# EAGLE board harp syringe pump v1.1 (EAGLE 9.6.2)
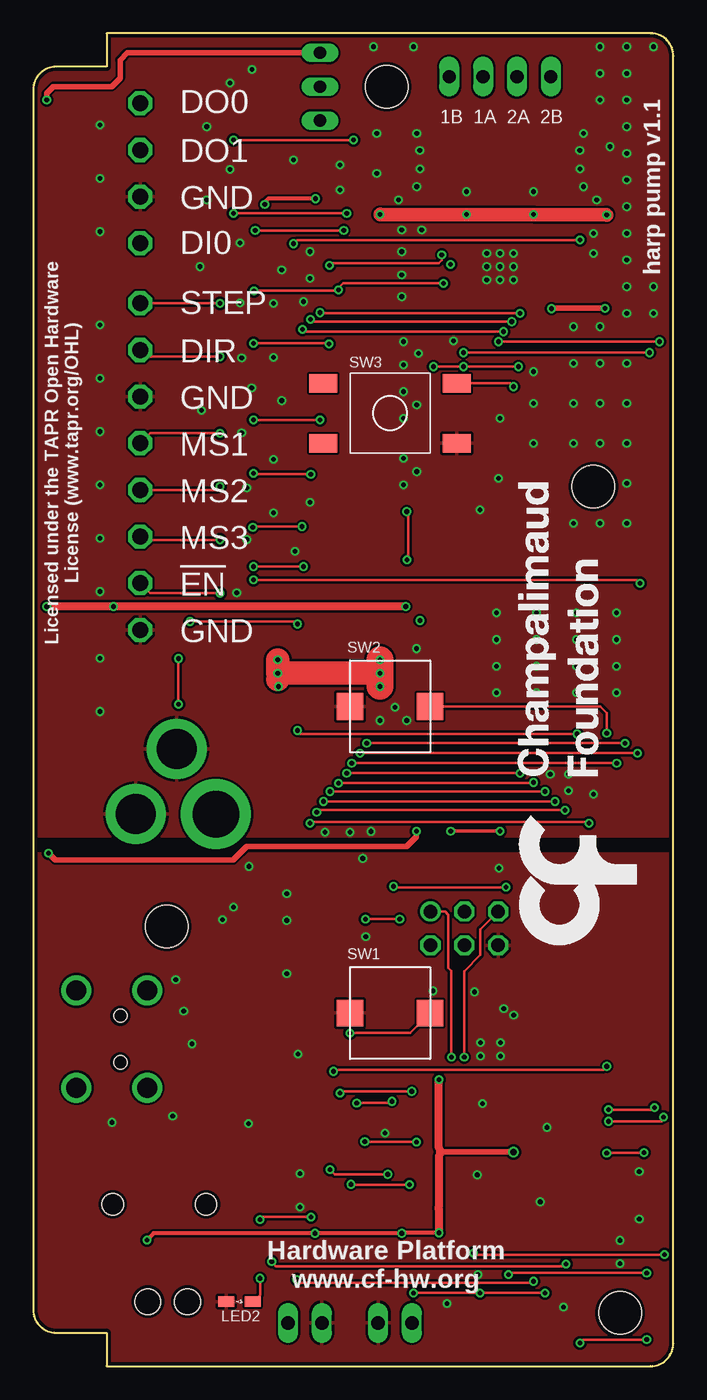
[diagram p0: board, top side]
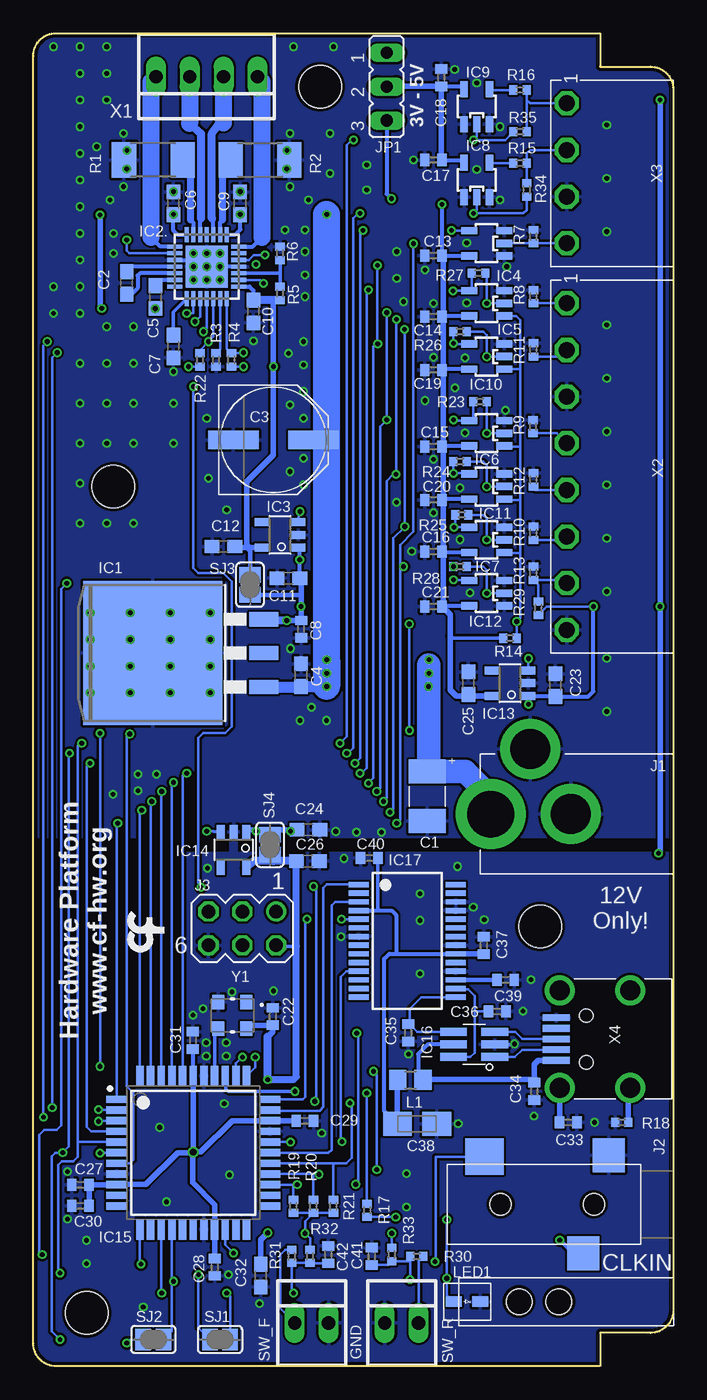
[diagram p1: board, bottom side, seen from below]

Size 48 x 100 mm. Coordinates in mm from the lower left corner, seen from the top.
Outline: 5.5,0 46.29,0 arc90 48,1.71 48,98.31 arc90 46.31,100 5.5,100 5.5,97.5 1.71,97.5 arc90 0,95.79 0,4.21 arc90 1.71,2.5 5.5,2.5 5.5,0
Copper layers (1*16): Top 0.018mm / dielectric 1.55mm / Bottom 0.018mm
Design rules "eC_2Layer_PClass5_BaseCopperO18 *": minimum track width 0.175mm, minimum drill 0.35mm, track to track 0.175mm, track to pad 0.175mm, pad to pad 0.175mm, via to via 0.175mm, smd to smd 0mil, copper to edge 0.25mm, drill to drill 0.35mm, minimum pad ring 0.2mm, minimum via ring 0.15mm, stop-mask expansion 0mil, vias tented up to drill 0.45mm, thermal gap 0.2mm
Holes 3.2 mm at 42,66 26.5,96 44,4 10,33

## Footprints (pad centres in the part's own frame; a part is rotated, then mirrored left to right if it is on the bottom)
CAP_100UF_HAND = smd 1.8 x 2.8: + -1.85,0; - 1.85,0
C0603 = smd 1.1 x 1: 1 -0.85,0; 2 0.85,0
PANASONIC_E = smd 3.8 x 1.4: + 3,0; - -3,0
C0402 = smd 0.7 x 0.9: 1 -0.65,0; 2 0.65,0
A/3216-18W = smd 2.15 x 1.8: + 1.475,0; - -1.475,0
TO263-3 = smd 1.067 x 2.159: 1 -2.54,-5.791; 2 0,-5.791; 3 2.54,-5.791 | smd 10.8 x 10.41: TAB 0,2.54
QFN28ET = smd 1.15 x 0.3: 1 -2.4,1.5; 2 -2.4,1; 3 -2.4,0.5; 4 -2.4,0; 5 -2.4,-0.5; 6 -2.4,-1; 7 -2.4,-1.5; 15 2.4,-1.5; 16 2.4,-1; 17 2.4,-0.5; 18 2.4,0; 19 2.4,0.5; 20 2.4,1; 21 2.4,1.5 | smd 0.3 x 1.15: 8 -1.5,-2.4; 9 -1,-2.4; 10 -0.5,-2.4; 11 0,-2.4; 12 0.5,-2.4; 13 1,-2.4; 14 1.5,-2.4; 22 1.5,2.4; 23 1,2.4; 24 0.5,2.4; 25 0,2.4; 26 -0.5,2.4; 27 -1,2.4; 28 -1.5,2.4 | smd 3.15 x 3.15: EXP 0,0
TSOT23-5 = smd 0.6 x 1.05: 1 -0.95,-1.354; 2 0,-1.354; 3 0.95,-1.354; 4 0.95,1.354; 5 -0.95,1.354
SOT23-5 = smd 0.55 x 1.2: 1 -0.95,-1.3; 2 0,-1.3; 3 0.95,-1.3; 4 0.95,1.3; 5 -0.95,1.3
QFP80P1200X1200X120-44N = smd 1.55 x 0.55: 1 -5.75,4; 2 -5.75,3.2; 3 -5.75,2.4; 4 -5.75,1.6; 5 -5.75,0.8; 6 -5.75,0; 7 -5.75,-0.8; 8 -5.75,-1.6; 9 -5.75,-2.4; 10 -5.75,-3.2; 11 -5.75,-4; 23 5.75,-4; 24 5.75,-3.2; 25 5.75,-2.4; 26 5.75,-1.6; 27 5.75,-0.8; 28 5.75,0; 29 5.75,0.8; 30 5.75,1.6; 31 5.75,2.4; 32 5.75,3.2; 33 5.75,4 | smd 0.55 x 1.55: 12 -4,-5.75; 13 -3.2,-5.75; 14 -2.4,-5.75; 15 -1.6,-5.75; 16 -0.8,-5.75; 17 0,-5.75; 18 0.8,-5.75; 19 1.6,-5.75; 20 2.4,-5.75; 21 3.2,-5.75; 22 4,-5.75; 34 4,5.75; 35 3.2,5.75; 36 2.4,5.75; 37 1.6,5.75; 38 0.8,5.75; 39 0,5.75; 40 -0.8,5.75; 41 -1.6,5.75; 42 -2.4,5.75; 43 -3.2,5.75; 44 -4,5.75
SOT23-6L = smd 0.6 x 2: P$1 -0.95,-1.55; P$2 0,-1.55; P$3 0.95,-1.55; P$4 0.95,1.55; P$5 0,1.55; P$6 -0.95,1.55
SSOP28 = smd 0.4 x 1.5: 1 -4.225,-3.625; 2 -3.575,-3.625; 3 -2.925,-3.625; 4 -2.275,-3.625; 5 -1.625,-3.625; 6 -0.975,-3.625; 7 -0.325,-3.625; 8 0.325,-3.625; 9 0.975,-3.625; 10 1.625,-3.625; 11 2.275,-3.625; 12 2.925,-3.625; 13 3.575,-3.625; 14 4.225,-3.625; 15 4.225,3.625; 16 3.575,3.625; 17 2.925,3.625; 18 2.275,3.625; 19 1.625,3.625; 20 0.975,3.625; 21 0.325,3.625; 22 -0.325,3.625; 23 -0.975,3.625; 24 -1.625,3.625; 25 -2.275,3.625; 26 -2.925,3.625; 27 -3.575,3.625; 28 -4.225,3.625
DC_POWER_INPUT_2.1MM = drill 3.5: P1 8.5,0 | drill 3: P2 2.5,0; P3 5.55,-4.9
35RASMT2BHNTRX = smd 2.4 x 2.55: 1 0.8,3.675; 5 -1.1,-3.675 | smd 2.9 x 2.75: 4 8.2,-3.575 | hole 1.6: 0,0; 7,0
MA03-2 = drill 1.016: 1 -2.54,-1.27 | drill 1.016 octagon: 2 -2.54,1.27; 3 0,-1.27; 4 0,1.27; 5 2.54,-1.27; 6 2.54,1.27
JP2 = drill 0.914 long: 1 -2.54,0; 2 0,0; 3 2.54,0
R0805 = smd 1.3 x 1.5: 1 -0.95,0; 2 0.95,0
LED_HAND = smd 1.2 x 0.8: A -1,0; K 1,0
R2010 = smd 1.8 x 2.7: 1 -2.2,0; 2 2.2,0
R0402 = smd 0.6 x 0.7: 1 -0.5,0; 2 0.5,0
SJ = smd 1.168 x 1.6: 1 -0.762,0; 2 0.762,0
SW_B3AL = smd 2 x 2: O -3,0; P 3,0
SWITCH_LSH = smd 2.1 x 1.4: O0 -5,2.25; O1 5,2.25; P0 -5,-2.25; P1 5,-2.25
22-23-2021 = drill 1 long: 1 -1.27,0; 2 1.27,0
LED_PIPE_7513D2-L = hole 1.93: -1.486,0; 1.486,0
22-23-2041 = drill 1 long: 1 -3.81,0; 2 -1.27,0; 3 1.27,0; 4 3.81,0
CON_3.5MM_1X8 = drill 1.2 octagon: P1 -12.25,0; P2 -8.75,0; P3 -5.25,0; P4 -1.75,0; P5 1.75,0; P6 5.25,0; P7 8.75,0; P8 12.25,0
CON_3.5MM_1X4 = drill 1.2 octagon: P1 -5.25,0; P2 -1.75,0; P3 1.75,0; P4 5.25,0
240-0002-1 = smd 0.5 x 2: P$1 -1.6,8.65; P$2 -0.8,8.65; P$3 0,8.65; P$4 0.8,8.65; P$5 1.6,8.65 | drill 1.5: SHIELD_1 -3.65,3.1; SHIELD_2 3.65,3.1; SHIELD_3 3.65,8.4; SHIELD_4 -3.65,8.4 | hole 1: -1.75,6.4; 1.75,6.4
OSCILLATOR_3.2X2.5 = smd 0.9 x 1.1: P$1 -1.05,-1; P$2 1.05,-1; P$3 1.05,1; P$4 -1.05,1

## Placement (x,y rotation side)
C1  22uF  [CAP_100UF_HAND]  18.45,42.76 270 bottom
C2  100nF  [C0603]  41,81.28 90 bottom
C3  100uF  [PANASONIC_E]  30,69.5 0 bottom
C4  220nF  [C0603]  27.93,51.85 270 bottom
C5  100nF  [C0603]  38.83,80.22 90 bottom
C6  1uF  [C0603]  37.5,87.25 90 bottom
C7  220nF  [C0603]  37.5,76.5 90 bottom
C8  100nF  [C0402]  27.93,55.3 90 bottom
C9  1uF  [C0603]  32.5,87.25 90 bottom
C10  220nF  [C0603]  31.5,79.12 90 bottom
C11  10uF  [C0603]  28.88,59.12 180 bottom
C12  10uF  [C0603]  33.75,61.5 180 bottom
C13  100nF  [C0402]  18,83.33 180 bottom
C14  100nF  [C0402]  18,78.75 180 bottom
C15  100nF  [C0402]  18,69 180 bottom
C16  100nF  [C0402]  18,61.12 180 bottom
C17  100nF  [C0402]  18,90.5 180 bottom
C18  100nF  [C0402]  17.4,96.67 90 bottom
C19  100nF  [C0402]  18,74.75 180 bottom
C20  100nF  [C0402]  18,65 180 bottom
C21  100nF  [C0402]  18,57 180 bottom
C22  100nF  [C0402]  30.04,26.24 90 bottom
C23  10uF  [C0603]  8.85,51.1 90 bottom
C24  10uF  [C0603]  27.37,40.24 0 bottom
C25  10uF  [C0603]  15.38,51.25 90 bottom
C26  10uF  [C0603]  27.41,37.89 0 bottom
C27  100nF  [C0402]  44.47,13.62 180 bottom
C28  100nF  [C0402]  34.4,7.43 270 bottom
C29  100nF  [C0402]  27.63,18.42 0 bottom
C30  330nF  [C0402]  44.47,12.03 180 bottom
C31  330nF  [C0402]  36.03,24.44 90 bottom
C32  10uF  [C0603]  30.95,6.8 270 bottom
C33  4.7nF  [C0402]  7.88,18.28 0 bottom
C34  100nF  [C0402]  10.42,20.62 270 bottom
C35  47pF  [C0402]  19.89,25 270 bottom
C36  47pF  [C0402]  13.21,26.6 0 bottom
C37  100nF  [C0402]  14.21,31.57 90 bottom
C38  4.7uF  [A/3216-18W]  19.22,18.17 180 bottom
C39  100nF  [C0402]  12.58,28.99 0 bottom
C40  100nF  [C0402]  22.8,38.12 180 bottom
C41  100nF  [C0402]  22.62,8.25 90 bottom
C42  100nF  [C0402]  25.88,8.38 90 bottom
IC1  LM340S-05  [TO263-3]  36.5,53.5 90 bottom
IC2.  A4983  [QFN28ET]  35,82.5 0 bottom
IC3  LP5907MFX-3.3  [TSOT23-5]  29.5,62.38 90 bottom
IC4  SN74LVC1G125  [SOT23-5]  14,84.25 90 bottom
IC5  SN74LVC1G125  [SOT23-5]  14,79.75 90 bottom
IC6  SN74LVC1G125  [SOT23-5]  14,70 90 bottom
IC7  SN74LVC1G125  [SOT23-5]  14,62 90 bottom
IC8  SN74LVC1G125  [SOT23-5]  14.75,89 0 bottom
IC9  SN74LVC1G125  [SOT23-5]  14.75,94.5 0 bottom
IC10  SN74LVC1G125  [SOT23-5]  14,75.75 90 bottom
IC11  SN74LVC1G125  [SOT23-5]  14,66 90 bottom
IC12  SN74LVC1G125  [SOT23-5]  14,58 90 bottom
IC13  LP5907MFX-3.3  [TSOT23-5]  12.25,51.25 90 bottom
IC14  LP5907MFX-3.3  [TSOT23-5]  32.98,38.74 180 bottom
IC15  ATXMEGA128A4U-AU  [QFP80P1200X1200X120-44N]  36,16.02 0 bottom
IC16  USBLC6-2SC6  [SOT23-6L]  14.94,24.14 90 bottom
IC17  FT232RL  [SSOP28]  19.95,31.91 270 bottom
J1  DC_JACK2.1MM  [DC_POWER_INPUT_2.1MM]  5.19,41.42 180 bottom
J2  STEREO_JACK  [35RASMT2BHNTRX]  5.96,12.14 180 bottom
J3  [MA03-2]  32.32,32.84 180 bottom
JP1  [JP2]  21.5,96 270 bottom
L1  ???  [R0805]  19.72,21.48 0 bottom
LED1  LEDHAND  [LED_HAND]  15.46,4.84 0 bottom
LED2  GREEN  [LED_HAND]  15.46,4.84 180 top
R1  0.1  [R2010]  39,90.5 180 bottom
R2  0.1  [R2010]  31,90.5 0 bottom
R3  25k  [R0402]  34.3,75.5 270 bottom
R4  100k  [R0402]  33.15,75.5 270 bottom
R5  54.9k  [R0402]  29.5,80.5 270 bottom
R6  24.9k  [R0402]  29.5,83.5 90 bottom
R7  100k  [R0402]  10.5,84.75 90 bottom
R8  100k  [R0402]  10.5,80.25 90 bottom
R9  100k  [R0402]  10.53,70.5 90 bottom
R10  100k  [R0402]  10.5,62.5 90 bottom
R11  100k  [R0402]  10.5,76.25 90 bottom
R12  100k  [R0402]  10.5,66.5 90 bottom
R13  NA  [R0402]  10.5,59.5 90 bottom
R14  100k  [R0402]  12.25,54.62 0 bottom
R15  33  [R0402]  11.5,90.25 0 bottom
R16  33  [R0402]  11.5,95.75 0 bottom
R17  68  [R0402]  22.97,11.69 90 bottom
R18  1M  [R0402]  3.87,18.3 180 bottom
R19  10k  [R0402]  28.5,12 270 bottom
R20  10k  [R0402]  27,12 270 bottom
R21  10k  [R0402]  25.5,12 270 bottom
R22  100k  [R0402]  35.5,75.5 270 bottom
R23  1k NA  [R0402]  14.5,72.38 180 bottom
R24  1k NA  [R0402]  16,67.88 180 bottom
R25  1k NA  [R0402]  15.88,63.88 180 bottom
R26  1k NA  [R0402]  16,77.62 180 bottom
R27  1k NA  [R0402]  14.62,82 180 bottom
R28  1k NA  [R0402]  16,60 180 bottom
R29  100k  [R0402]  10.12,56.88 270 bottom
R30  33  [R0402]  19.25,8.25 180 bottom
R31  33  [R0402]  28.62,8.25 270 bottom
R32  NA  [R0402]  27.25,8.25 90 bottom
R33  NA  [R0402]  21.12,8.38 270 bottom
R34  33 NA  [R0402]  11,88.25 90 bottom
R35  33 NA  [R0402]  11.5,92.62 0 bottom
SJ1  [SJ]  34,2 180 bottom
SJ2  [SJ]  39,2 180 bottom
SJ3  [SJ]  31.75,58.62 90 bottom
SJ4  [SJ]  30.25,39.12 270 bottom
SW1  SW1B3AL  [SW_B3AL]  26.75,26.5 0 top
SW2  SW1B3AL  [SW_B3AL]  26.75,49.5 0 top
SW3  SW_LSH  [SWITCH_LSH]  26.75,71.5 180 top
SW_F  22-23-2021  [22-23-2021]  27.12,3.25 0 bottom
SW_R  22-23-2021  [22-23-2021]  20.38,3.25 0 bottom
U$2  [LOGO_5]  39.53,34.68 90 top
U$3  [LED_PIPE_7513D2-L]  10.07,4.84 180 bottom
U$4  [LOGO_8]  40,32 90 bottom
X1  22-23-2041  [22-23-2041]  35,96.75 180 bottom
X2  CON_3.5MM_1X8  [CON_3.5MM_1X8]  8,67.5 270 bottom
X3  CON_3.5MM_1X4  [CON_3.5MM_1X4]  8,89.5 270 bottom
X4  USB_MINI_B  [240-0002-1]  0.13,24.54 90 bottom
Y1  OSCILLATOR  [OSCILLATOR_3.2X2.5]  33.07,26.32 180 bottom

## Library data of the parts
C1 J1 LED1 LED2 SW1-SW3 U$2-U$4 Y1 = CNP-miscellaneous
C2-C42 = rcl; SPICEPREFIX: C
IC1 = linear
IC2. = allegro; MPN: A4983SETTR-T; OC_FARNELL: 1688956; OC_NEWARK: 39M6763
IC3 IC13 IC14 = CNP-ics 2
IC4-IC9 IC11 IC12 IC16 = CNP-ics 1
IC10 = CNP-ics 1; SPICEPREFIX: IC
IC15 = xmega-a4
IC17 = ftdichip; MPN: FT232RL; OC_FARNELL: 1146032; OC_NEWARK: 91K9918
J2 X2-X4 = CNP-connectors
J3 = con-lstb; OC_FARNELL: unknown; OC_NEWARK: unknown
JP1 SJ1-SJ4 = jumper
L1 R1-R35 = rcl; SPICEPREFIX: R
SW_F SW_R = con-molex; MF: MOLEX; MPN: 22-23-2021; OC_FARNELL: 1462926; OC_NEWARK: 25C3832
X1 = con-molex; MF: MOLEX; MPN: 22-23-2041; OC_FARNELL: 1462920; OC_NEWARK: 38C0355

## Nets
3V3OUT: C39.1 IC17.17
!BUF_EN: IC5.1 IC6.1 IC7.1 IC10.1 IC11.1 IC15.7 R14.2
!EN_DRIVER: IC2..2 IC15.1 R28.2
!EN_DRIVER_IN: IC12.2 R13.1 R28.1 R29.1 X2.P7
!EN_DRIVER_UC: IC12.4 IC15.20
!RESET: IC2..12 IC15.3 R22.1
!SLEEP: IC2..14 IC15.2 R4.1
+5V: C8.2 C11.1 C23.1 C24.1 IC1.3 IC3.1 IC3.3 IC13.1 IC13.3 IC14.1 IC14.3 JP1.1 R29.2 SJ3.1 SJ4.1
+12V: C1.+ C3.+ C4.2 C5.1 C6.1 C9.1 IC1.1 IC2..22 IC2..28 J1.P1
+V: C17.1 C18.1 IC8.5 IC9.5 JP1.2
BUT_PULL: IC15.26 R20.1 SW2.P
BUT_PUSH: IC15.25 R19.1 SW1.P
BUT_RESET: IC15.27 R21.1 SW3.P0
CLK_SYNC: IC15.12 J2.4
CP1: C2.2 IC2..4
CP2: C2.1 IC2..5
DI0: IC4.2 R7.1 X3.P4
DIR: IC2..19 IC10.4 IC15.41 R26.2
DIR_IN: IC10.2 R11.1 R26.1 X2.P2
DO0: R16.2 R35.2 X3.P1
DO1: R15.2 R34.2 X3.P2
FT_CTS: IC15.29 IC17.11
FT_RTS: IC15.28 IC17.3
FT_RXD: IC15.33 IC17.5
FT_TXD: IC15.32 IC17.1
GND: C1.- C3.- C4.1 C6.2 C7.1 C8.1 C9.2 C10.1 C11.2 C12.2 C13.2 C14.2 C15.2 C16.2 C17.2 C18.2 C19.2 C20.2 C21.2 C22.2 C23.2 C24.2 C25.2 C26.2 C27.2 C28.2 C29.2 C30.2 C31.2 C32.2 C33.2 C34.2 C35.2 C36.2 C37.2 C38.- C39.2 C40.2 C41.2 C42.2 IC1.TAB IC2..3 IC2..18 IC2..EXP IC3.2 IC4.1 IC4.3 IC5.3 IC6.3 IC7.3 IC8.1 IC8.3 IC9.1 IC9.3 IC10.3 IC11.3 IC12.1 IC12.3 IC13.2 IC14.2 IC15.8 IC15.18 IC15.30 IC15.38 IC16.P$2 IC17.7 IC17.18 IC17.21 IC17.25 IC17.26 J1.P2 J1.P3 J2.5 J3.6 LED1.K LED2.K R1.2 R2.2 R3.2 R6.2 R7.2 R8.2 R9.2 R10.2 R11.2 R12.2 R13.2 R18.2 SW1.O SW2.O SW3.O0 SW_F.2 SW_R.1 X2.P3 X2.P8 X3.P3 X4.P$5 Y1.P$2
IN00: IC4.4 IC15.4
MS1: IC2..9 IC6.4 IC15.42 R23.2
MS1_IN: IC6.2 R9.1 R23.1 X2.P4
MS2: IC2..10 IC11.4 IC15.43 R24.2
MS2_IN: IC11.2 R12.1 R24.1 X2.P5
MS3: IC2..11 IC7.4 IC15.44 R25.2
MS3_IN: IC7.2 R10.1 R25.1 X2.P6
N$1: IC8.4 R15.1
N$3: R30.1 SW_R.2
N$4: C7.2 IC2..8
N$5: R31.1 SW_F.1
N$6: IC2..13 R3.1
N$11: IC9.4 R16.1
N$13: IC16.P$3 X4.P$3
N$15: C33.1 X4.SHIELD_4
N$23: LED1.A LED2.A R17.1
N$60: C34.1 IC16.P$5 L1.2 X4.P$1
N$601: R18.1 X4.SHIELD_1
N$701: IC16.P$1 X4.P$2
OSC1: IC15.37 Y1.P$3
OUT00: IC9.2 IC15.5 R35.1 SJ1.2
OUT01: IC8.2 IC15.6 R34.1 SJ2.2
OUT1A: IC2..24 X1.2
OUT1B: IC2..21 X1.1
OUT2A: IC2..26 X1.3
OUT2B: IC2..1 X1.4
PDI-CLK: IC15.35 J3.5
PDI-DATA: IC15.34 J3.1
REF: IC2..17 R5.1 R6.1
SENSE1: IC2..23 R2.1
SENSE2: IC2..27 R1.1
STATE: IC15.36 R17.2
STEP: IC2..16 IC5.4 IC15.40 R27.2
STEP_IN: IC5.2 R8.1 R27.1 X2.P1
SW_F: C42.1 IC15.14 R31.2 R32.1 SJ1.1
SW_R: C41.1 IC15.15 R30.2 R33.2 SJ2.1
USB5V: C37.1 C38.+ C40.1 IC17.4 IC17.20 L1.1
USBDM: C36.1 IC16.P$6 IC17.16
USBDP: C35.1 IC16.P$4 IC17.15
VCCINT: C13.1 C14.1 C15.1 C16.1 C19.1 C20.1 C21.1 C25.1 IC4.5 IC5.5 IC6.5 IC7.5 IC10.5 IC11.5 IC12.5 IC13.5 JP1.3 R14.1
VCCIO: C22.1 C26.1 C27.1 C28.1 C29.1 C30.1 C31.1 C32.1 IC14.5 IC15.9 IC15.19 IC15.31 IC15.39 J2.1 J3.2 R19.2 R20.2 R21.2 R32.2 R33.1 SJ4.2 Y1.P$4
VCP: C5.2 IC2..6
VDD_M: C10.2 C12.1 IC2..15 IC3.5 R4.2 R5.2 R22.2 SJ3.2

## Tracks (layer width: path | path; a pad name or v marks a point on that pad's centre or on a via)
3V3OUT
  Bottom 0.305: 13.54,28.99 C39.1
  Bottom 0.356: IC17.17 13.54,28.99
!BUF_EN  (via drill 0.35 pad 0.6)
  Top 0.203: v40.76,47.44 20.06,47.44 v19.8,47.7 | v11.75,55.88 19.62,55.88 v19.81,55.69
  Bottom 0.203: IC5.1 11.8,78.8 11.5,78.5 11.5,74.8 | 11.5,74.8 11.5,69 | 11.5,69 11.5,65 | 11.5,65 11.5,61 | 11.5,61 11.5,56.12 v11.75,55.88 R14.2 | IC7.1 12.65,61 11.5,61 | IC11.1 12.65,65 11.5,65 | IC6.1 12.65,69 11.5,69 | IC10.1 11.5,74.8 | IC15.7 40.78,15.22 40.5,15.5 40.5,20.5 41,21 41,47.27 40.8,47.48 v40.76,47.44 | v19.8,47.7 19.8,55.67 v19.81,55.69
!EN_DRIVER  (via drill 0.35 pad 0.6)
  Top 0.203: v20.75,40.75 20.82,40.83 41.6,40.83 v41.67,40.75 | v19.5,84.22 19.77,84.5 v41,84.5 | R28.2 v20.25,60
  Bottom 0.203: v20.75,40.75 20.5,41 20.5,60 | 20.5,60 20.5,61.62 19.5,62.62 v19.5,84.22 | v41.67,40.75 41.67,40.58 41.75,40.5 IC15.1 | IC2..2 40.8,83.5 41,83.7 v41,84.5 | v20.25,60 20.5,60
  other vias: 16.5,60
!EN_DRIVER_IN  (via drill 0.35 pad 0.6)
  Top 0.203: v14,58 8.75,58 X2.P7
  Bottom 0.175: R13.1 10.12,58.62 R29.1
  Bottom 0.203: R13.1 8.25,59 X2.P7 | IC12.2 v14,58 14,59.75 14.25,60 R28.1
!EN_DRIVER_UC  (via drill 0.35 pad 0.6)
  Top 0.203: v47.33,8.38 33.12,8.38 v33,8.5 | v16.5,59 45.25,59 v45.5,58.75
  Bottom 0.203: IC15.20 33.6,9.1 v33,8.5 | v47.33,8.38 47.42,8.38 47.57,8.52 47.57,17.38 47.2,17.75 46.25,17.75 45.92,18.07 45.92,58.33 v45.5,58.75 | IC12.4 15.35,59 v16.5,59
!RESET  (via drill 0.35 pad 0.6)
  Top 0.203: v43.12,18.38 47.12,18.38 47.25,18.5 v47.25,18.7 | v46.95,76.88 v34.88,76.88
  Bottom 0.203: v47.25,18.7 47.25,76.58 v46.95,76.88 | IC15.3 43.08,18.42 v43.12,18.38 | IC2..12 34.5,77.25 v34.88,76.88 35.5,76.25 R22.1
!SLEEP  (via drill 0.35 pad 0.6)
  Top 0.203: v43.12,19.25 46.5,19.25 46.58,19.32 v46.58,19.4 | v46.2,76.05 v32.25,76.05
  Bottom 0.203: IC2..14 33.5,76.35 R4.1 32.3,76 v32.25,76.05 | IC15.2 42.97,19.22 43,19.25 v43.12,19.25 | v46.2,76.05 46.58,75.67 v46.58,19.4
+5V  (via drill 0.35 pad 0.6)
  Top 0.203: v28,64.12 28.12,64 28.12,60.6 v28.02,60.5 | v10.88,49.67 v10.88,53.1
  Top 0.254: v34.99,40.14 v31.3,40.14
  Top 0.406: JP1.1 7.04,98.54 6.5,98 6.5,96.62 5.88,96 1.5,96 1,95.5 v1,95 | v28.73,40.15 28.73,39.73 28,39 16,39 15,38 1.62,38 v1.12,38.5
  Top 0.61: v27.93,57 v6,57 v1,57
  Bottom 0.175: R29.2 9.69,56.81 9.67,56.81 9.48,57 v6,57
  Bottom 0.203: IC3.3 28.1,64.03 v28,64.12 | IC13.1 10.85,50.12 10.85,49.7 v10.88,49.67 | v10.88,53.1 10.88,52.23 IC13.3 | v28.73,40.15 28.63,40.24 C24.1
  Bottom 0.254: v34.99,40.14 v34.98,40.15 IC14.3 | IC14.1 32.03,40.14 v31.3,40.14
  Bottom 0.305: C11.1 v28.02,60.5 28.02,61.35 IC3.1 | IC13.1 8.9,50.3 C23.1 6.38,50.25 6,50.62 v6,57
  Bottom 0.356: SJ3.1 28.06,57.86 27.93,58 | SJ4.1 30,40.14 30,40.24
  Bottom 0.406: IC14.1 31.94,40.24 30,40.24 C24.1 | C11.1 27.93,59.02 27.93,58 v27.93,57 C8.2 v29,55.95 | v1.12,38.5 1,38.62 v1,57 v1,95
  Bottom 0.61: IC1.3 30.62,55.95 v29,55.95
+12V  (via drill 0.35, 0.35 pad 0.6)
  Top 0.406: v18.33,52 18.38,51.57 18.33,51.52 | v42.88,79.38 38.88,79.38 v38.85,79.35
  Top 1.016: v26,86.42 26.02,86.4 v32.48,86.4 C6.1 42.98,86.4 v43,86.38
  Top 1.778: 18.33,51.52 18.7,52 v26,52 | v18.33,52 v18.33,53
  Top 2.032: v26,51 v26,53
  Bottom 0.203: C5.1 v38.85,79.35
  Bottom 0.305: IC2..28 37.2,84.9 37.5,85.2 C6.1 | IC2..22 32.85,84.9 32.48,85.28 32.48,86.38 C9.1 v32.48,86.4
  Bottom 0.406: v18.38,51 18.33,51.05 18.33,52.62 | v18.33,52 18.33,51 | v43,86.38 43,79.5 v42.88,79.38 | v26,52 v26,51
  Bottom 0.813: IC1.1 27.96,50.96 C4.2 v26,51
  Bottom 1.016: C3.+ 26.5,69.5 26,69
  Bottom 1.778: J1.P1 13.69,42.69 15.61,44.61 C1.+ 18.33,44.73 18.33,51 18.33,52.62
  Bottom 2.032: v26,52 26,69 v26,86.42 | v26,53 v26,51
  other vias: 37.5,86.4
+V
  Bottom 0.203: 15.93,96.03 IC9.5
  Bottom 0.305: C17.1 15.9,90.5 IC8.5 | C18.1 15.93,96.03
  Bottom 0.406: C17.1 17.4,90.55 C18.1 21.48,96.03 JP1.2
BUT_PULL  (via drill 0.35 pad 0.6)
  Top 0.203: v26.57,14.4 22.6,14.4 v22.25,14.75 | v22.5,22.12 22.62,22.25 42.75,22.25 v43,22.5 | SW2.P 42.5,49.5 43,49 v43,47.5
  Bottom 0.203: IC15.26 27,14.42 | 27,14.42 26.59,14.42 v26.57,14.4 | v22.25,14.75 22.25,21.88 v22.5,22.12 | v43,47.5 v43,22.5 | R20.1 27,14.42
BUT_PUSH  (via drill 0.35 pad 0.6)
  Top 0.203: SW1.P 28.25,25 v23.75,25 | v23.82,13.65 23.86,13.62 v28.21,13.62
  Bottom 0.203: v23.82,13.65 23.62,13.85 23.62,24.88 v23.75,25 | IC15.25 28.5,13.62 | 28.5,13.62 v28.21,13.62 | R19.1 28.5,13.62
BUT_RESET  (via drill 0.35 pad 0.6)
  Top 0.203: SW3.P0 35.75,73.75 v36,73.5 | v35.44,35.94 27,35.94 v27,36 | v24.25,19.75 26.75,19.75 26.9,19.9 v26.9,19.88
  Bottom 0.203: v36,73.5 36,59.88 35.62,59.5 33.75,59.5 33.12,58.88 33.12,48 33.62,47.5 35.25,47.5 35.62,47.12 35.62,36.25 35.38,36 v35.44,35.94 | v27,36 26.8,35.8 26.8,19.98 v26.9,19.88 | IC15.27 25.5,15.22 | 25.5,15.22 24.53,15.22 24.12,15.62 24.12,19.75 v24.25,19.75 | R21.1 25.5,15.22
CLK_SYNC  (via drill 0.35 pad 0.6)
  Top 0.203: v39.94,7.66 39.79,7.51 18.16,7.51 17.88,7.8 v17.88,7.85
  Bottom 0.203: IC15.12 40,7.73 v39.94,7.66 | J2.4 17.82,15.72 17.82,7.9 v17.88,7.85
CP1
  Bottom 0.305: IC2..4 40.62,82.5 C2.2
CP2
  Bottom 0.305: C2.1 40.62,80.42 40.17,80.88 40.17,81.83 40,82 IC2..5
DI0
  Bottom 0.203: X3.P4 R7.1 IC4.2
DIR  (via drill 0.35 pad 0.6)
  Top 0.203: v16.5,76.75 22.12,76.75 v22.18,76.7 | v22.2,82.58 22.38,82.75 30.4,82.75 30.62,82.97 v30.62,83.38 | v37.5,43.8 37.45,43.75 v22.88,43.75
  Bottom 0.203: IC2..19 31.85,83 31.48,83.38 v30.62,83.38 | v22.88,43.75 22.5,44.12 22.5,76.5 22.3,76.7 v22.18,76.7 22.2,76.72 v22.2,82.58 | IC15.41 37.6,43.7 v37.5,43.8 | IC10.4 16.45,76.7 v16.5,76.75 R26.2
DIR_IN  (via drill 0.35 pad 0.6)
  Top 0.203: v14,75.75 8.5,75.75 X2.P2
  Bottom 0.203: R11.1 8.5,75.75 X2.P2 | IC10.2 v14,75.75 14,77.38 14.25,77.62 R26.1
DO0
  Bottom 0.203: X3.P1 10.75,94.75 11,95 | 11,95 R16.2 | R35.2 11,95
DO1
  Bottom 0.203: X3.P2 10.75,91.25 11,91 R15.2 R34.2
FT_CTS  (via drill 0.35 pad 0.6)
  Top 0.203: v28.73,16.82 24.88,16.82 v24.85,16.85
  Bottom 0.203: IC17.11 24.54,29.64 24.95,29.23 24.95,16.95 v24.85,16.85 | IC15.29 28.66,16.82 28.65,16.82 v28.73,16.82
FT_RTS
  Bottom 0.203: IC17.3 25.38,34.84 25.62,34.59 25.62,16.25 25.88,16 30.23,16 IC15.28
FT_RXD  (via drill 0.35 pad 0.6)
  Top 0.203: v24.9,33.55 v27.48,33.55
  Bottom 0.203: IC15.33 27.81,20.02 27.6,20.23 27.6,33.42 v27.48,33.55 | IC17.5 24.89,33.54 v24.9,33.55
FT_TXD
  Bottom 0.203: IC15.32 30.21,19.18 26.52,19.18 26.25,19.45 26.25,35.89 26,36.14 IC17.1
GND  (via drill 0.35 pad 0.6)
  Bottom 0.203: v29,89.83 29,90.33 29.18,90.5 | v41,89.83 41,90.3 R1.2 | 29.18,90.5 28.98,90.7 v28.98,91.2 | R2.2 29.18,90.5 | 36.5,83 v36,82.5
  Bottom 0.305: IC16.P$2 11.94,24.14 v11.9,24.18 | IC2..18 v34,82.5 | IC2..3 36.5,83
  other vias: 24.71,38.1 38.51,17.92 33.3,14.35 38.02,12.33 33.68,19.7 45.44,14.61 33.35,6.88 31.04,4.71 29.98,28.16 35.28,26.83 36.03,26.33 33.53,24.27 33.1,28.08 45.44,11.03 25.32,40.12 32.48,88.12 37.5,88.12 40.98,91.2 35,82.5 34,83.5 35,83.5 36,83.5 34,81.5 35,81.5 36,81.5 26.38,17.5 14.19,33.5 10.69,29 11.29,26.65 19.86,23.42 24.94,32.22 15.01,34.45 16.14,18.2 5.91,18.3 10.46,18.77 33.53,23.27 35.03,23.27 35.03,24.27 44.5,87 28.73,53.85 13,93 13,87.5 19.5,90.5 16.4,97.3 12.5,82.5 12.6,71.72 18,64.03 19.62,61.15 18,68.03 18,75.7 18,79.75 18.62,82.25 37.5,74.62 31.5,76.92 28.75,88.5 28.75,92.5 41.25,92.5 41.25,88.5 34.94,37.37 16.19,37.5 34.73,56.52 34.73,54.52 34.73,52.52 34.73,50.52 37.73,56.52 40.73,56.52 40.73,54.52 37.73,54.52 37.73,52.52 37.73,50.52 40.73,50.52 43.73,50.52 43.73,52.52 43.73,54.52 43.73,56.52 40.73,52.52 44.5,89 44.5,85 44.5,83 44.5,81 44.5,79 40.5,78 42.5,78 44.5,91 44.5,93 44.5,95 44.5,97 44.5,99 42.5,99 42.5,97 28.5,99 25.5,99 25.75,92.5 25.75,89.5 27.62,85.25 27.62,83.62 27.62,81.88 27.62,80.25 27.75,76.88 27.75,75.12 40.5,75.25 42.5,75.25 44.5,75.25 37.5,72.25 40.5,72.25 42.5,72.25 44.5,72.25 44.5,69.25 42.5,69.25 40.5,69.25 37.5,69.25 40.5,63.25 42.5,63.25 44.5,63.25 33.5,64.25 34.88,66.62 35,71.12 27.38,87.5 29.12,85.25 20.75,81.62 20.25,79.88 20.75,83.62 23,90.12 23,88.25 27.75,73.12 27.75,71.12 27.75,68.12 27.75,66.12 28.75,67.12 28.75,72.12 46.5,79 46.5,81 46.5,99 42,85 42,83.5 28.88,76 42.25,87.5 43.25,91.5 42.5,95 15.25,58.02 16,62.02 16,65.9 15.62,70.03 16.38,73.4 15.62,75.65 15.5,79.78 15.5,84.28 14.75,89.78 14.75,96.28 44.5,66.25 5,93.12 5,89.12 5,85.12 5,78.12 5,74.12 5,70.12 5,66.12 5,62.12 5,58.12 5,53.12 5,49.12 19.01,35.45 19.01,33.45 19.01,29.45 20.01,14.45 20.01,11.95 44.01,9.45 26.01,48.45 28.01,48.45 20.76,64.82 18.64,72.45 44.01,7.7 39.76,4.45 42.01,42.92 27.14,49.45 23.76,40.07 21.89,40.07 38.76,44.42 40.14,44.42 40.14,43.17
  pour Top (rank 2): 0,38.5 48,38.5 48,1.71 arc-90 46.29,0 5.5,0 5.5,2.5 1.71,2.5 arc-90 0,4.21
  pour Bottom (rank 2): 0,38.5 48,38.5 48,1.71 arc-90 46.29,0 5.5,0 5.5,2.5 1.71,2.5 arc-90 0,4.21
  pour Bottom (rank 2): 0,97.5 5.5,97.5 5.5,100 48,100 48,39.71 0,39.71
  pour Bottom: 32.75,41.5 33.25,41.5 33.25,38 32.75,38
  pour Top (rank 2): 0,97.5 5.5,97.5 5.5,100 48,100 48,39.71 0,39.71
IN00  (via drill 0.35 pad 0.6)
  Top 0.203: v23.88,45.25 v43.75,45.25 | v16.65,85.2 v23.27,85.2
  Bottom 0.203: IC15.4 43.67,17.62 44,17.95 44,45 v43.75,45.25 | v23.27,85.2 23.5,84.97 23.5,45.62 v23.88,45.25 | IC4.4 v16.65,85.2
MS1  (via drill 0.35 pad 0.6)
  Top 0.203: v22.25,43.12 v38.38,43.12 | v16.5,71 v21.5,71 | v36.5,79 21.55,79 v21.5,79.05
  Bottom 0.203: IC2..9 36,79 v36.5,79 | v22.25,43.12 22,43.38 22,70.5 v21.5,71 v21.5,79.05 | v38.38,43.12 38.38,43 38.4,42.97 IC15.42 | v16.5,71 16.45,70.95 IC6.4 15.05,70.95 15,71 R23.2
MS1_IN  (via drill 0.35 pad 0.6)
  Top 0.203: X2.P4 8.75,70 v14,70
  Bottom 0.203: X2.P4 8.75,70 R9.1 | IC6.2 v14,70 R23.1
MS2  (via drill 0.35 pad 0.6)
  Top 0.203: v21.75,42.38 v39.12,42.38 | v16.5,67 16.57,66.92 v20.8,66.92 | v20.77,78.53 20.93,78.38 v35.88,78.38
  Bottom 0.203: IC2..10 35.5,78.75 v35.88,78.38 | v21.75,42.38 21.5,42.62 21.5,66.42 21,66.92 v20.8,66.92 20.8,78.5 v20.77,78.53 | v39.12,42.38 39.12,42.25 39.2,42.17 IC15.43 | IC11.4 15.35,67 v16.5,67 R24.2
MS2_IN  (via drill 0.35 pad 0.6)
  Top 0.203: v14,66 13.75,65.75 X2.P5
  Bottom 0.203: R12.1 10.62,66 10.38,65.75 X2.P5 | IC11.2 v14,66 14,67.62 14.25,67.88 R24.1
MS3  (via drill 0.35 pad 0.6)
  Top 0.203: v39.88,41.73 21.4,41.73 v21.25,41.58 | v16.45,62.95 16.5,63 v20.15,63 | v20.18,77.78 20.32,77.62 v35.25,77.62
  Bottom 0.203: IC15.44 40,41.6 v39.88,41.73 | v21.25,41.58 21,41.83 21,62.12 20.15,62.98 v20.15,63 20.15,77.75 v20.18,77.78 | IC7.4 v16.45,62.95 16.38,63.02 R25.2 | v35.25,77.62 35,77.88 IC2..11
MS3_IN  (via drill 0.35 pad 0.6)
  Top 0.203: v14,62 8.25,62 X2.P6
  Bottom 0.203: R10.1 8.25,62 X2.P6 | IC7.2 v14,62 14,63.62 14.25,63.88 R25.1
N$1
  Bottom 0.203: R15.1 13.75,90.25 IC8.4
N$2  (via drill 0.35 pad 0.6)
  other vias: 31.3,82.65
N$3
  Bottom 0.203: R30.1 19.11,7.89 SW_R.2
N$4
  Bottom 0.254: IC2..8 37.5,79.1 C7.2
N$5
  Bottom 0.203: R31.1 29.12,8.75 29.5,8.38 29.5,4.36 SW_F.1
N$6
  Bottom 0.203: IC2..13 34,76.3 R3.1
N$11
  Bottom 0.203: R16.1 13.75,95.75 IC9.4
N$13
  Bottom 0.203: IC16.P$3 11.85,25.09 11.32,24.56 8.8,24.56
  Bottom 0.305: 8.8,24.56 X4.P$3
N$15
  Bottom 0.305: 8.51,20.87 X4.SHIELD_4
  Bottom 0.406: C33.1 8.51,20.87
N$23  (via drill 0.35, 0.35 pad 0.6)
  Top 0.203: v17,6.6 17,5.37 LED2.A | v20.82,11.19 17.19,11.19 v17,11
  Bottom 0.203: LED2.A 17,5.37 v17,6.6 v17,11 | R17.1 v20.82,11.19
N$60
  Bottom 0.305: IC16.P$5 18.42,24.14 19.14,23.41 19.14,22.14 18.51,21.51 18.99,21.51 L1.2 | 8.86,22.95 X4.P$1 | C34.1 10.42,21.38
  Bottom 0.406: 18.51,21.51 10.29,21.51 10.42,21.38 | C34.1 10.42,22.66 10.12,22.95 8.86,22.95
N$601
  Bottom 0.406: X4.SHIELD_1 3.37,20.76 R18.1
N$701
  Bottom 0.203: IC16.P$1 11.89,23.19 11.33,23.75 X4.P$2
OSC1
  Bottom 0.254: IC15.37 34.4,25.04
  Bottom 0.305: 34.4,25.04 Y1.P$3
OUT00  (via drill 0.35 pad 0.6)
  Top 0.203: v25,46.75 v44.38,46.75 | v15,92 v24,92 | v46,7 35.75,7 v35.62,6.88
  Bottom 0.203: IC15.5 44.66,16.82 | IC9.2 14.75,92.25 v15,92 12.62,92 R35.1 | v44.38,46.75 44.45,46.75 44.66,46.54 44.66,16.82 | v24,92 24.12,92 24.5,91.62 24.5,47.25 v25,46.75 | v46,7 46.12,7.12 46.12,15.12 45.88,15.38 45,15.38 44.66,15.71 44.66,16.82 | v35.62,6.88 35.62,2.86 SJ1.2
OUT01  (via drill 0.35 pad 0.6)
  Top 0.203: v24.5,46 v45.3,46 | v15,86.5 v23.5,86.5 | v45.79,16.02 43.02,16.02 v43,16 | v46,2 41.25,2 v41,1.75
  Bottom 0.203: IC8.2 14.75,86.75 v15,86.5 11.25,86.5 11,86.75 R34.1 | v24.5,46 24.38,46 24,46.38 24,86.12 23.62,86.5 v23.5,86.5 | v45.3,46 45.33,45.98 45.33,16.49 v45.79,16.02 46.36,16.02 46.62,15.75 46.62,2.62 v46,2 | IC15.6 42.98,16.02 v43,16 | v41,1.75 40.75,2 SJ2.2
OUT1A
  Bottom 0.254: 33.75,93.28 33.91,93.43
  Bottom 0.305: IC2..24 34.5,85.96 34.6,86.11
  Bottom 0.61: 34.6,86.11 34.6,92.48 33.91,93.43
  Bottom 1.27: X1.2 33.75,96.73 33.75,93.28
OUT1B
  Bottom 0.305: 30.84,84.69 31.53,84 IC2..21
  Bottom 1.27: X1.1 30.84,96.4 30.84,84.69
OUT2A
  Bottom 0.254: 36.27,93.23 36.04,93 36,93
  Bottom 0.305: IC2..26 35.5,85.96 35.41,86.11
  Bottom 0.61: 35.41,86.11 35.41,92.49 36,93
  Bottom 1.27: X1.3 36.27,93.23
OUT2B
  Bottom 0.305: IC2..1 38.47,84 39.16,84.69
  Bottom 1.27: X1.4 39.16,96.4 39.16,84.69
PDI-CLK  (via drill 0.35 pad 0.6)
  Top 0.203: v32.31,23.19 32.31,29.64 33.52,30.85 33.52,32.77 J3.5
  Bottom 0.203: IC15.35 32.8,22.72 32.33,23.2 v32.31,23.19
PDI-DATA  (via drill 0.35 pad 0.6)
  Top 0.203: v31.35,23.2 31.35,29.65 31.12,29.88 31.12,33.88 30.89,34.11 J3.1
  Bottom 0.203: IC15.34 31.35,22.42 v31.35,23.2
REF
  Bottom 0.254: IC2..17 29.5,82 | 29.5,82 R6.1 | R5.1 29.5,82
SENSE1
  Bottom 0.305: IC2..23 34,85.8 33.8,86 | 33.8,90.2 33.8,89.9 R2.1
  Bottom 0.508: 33.8,86 33.8,90.2
SENSE2
  Bottom 0.305: IC2..27 36,85.78 36.23,86
  Bottom 0.508: R1.1 36.23,89.92 36.23,86
STATE  (via drill 0.35 pad 0.6)
  Top 0.203: v28.38,20.62 23.12,20.62 v23,20.5
  Bottom 0.203: 28.5,20.62 v28.38,20.62 | R17.2 23,12.22 v23,20.5
  Bottom 0.254: IC15.36 33.56,21.73 33.56,20.81 33.38,20.62 28.5,20.62
STEP  (via drill 0.35 pad 0.6)
  Top 0.203: v36.5,44.5 v23.5,44.5 | v16.54,80.69 22.81,80.69 v22.88,80.75 22.88,80.88 23.25,81.25 v30.75,81.25
  Bottom 0.203: IC15.40 36.8,44.32 36.62,44.5 v36.5,44.5 | v23.5,44.5 23.38,44.5 23,44.88 23,80.75 v22.88,80.75 | v16.54,80.69 16.52,80.7 IC5.4 15.12,80.88 R27.2 | v30.75,81.25 31,81.5 IC2..16
STEP_IN  (via drill 0.35 pad 0.6)
  Top 0.203: v14,79.75 X2.P1
  Bottom 0.203: R8.1 X2.P1 | IC5.2 v14,79.75 14,81.88 R27.1
SW_F  (via drill 0.35, 0.35 pad 0.6)
  Top 0.203: v28.5,5.5 v33.5,5.5 35,5.5 v38.38,5.5
  Bottom 0.203: IC15.14 38.4,5.53 v38.38,5.5 | SJ1.1 33.24,5.24 v33.5,5.5 | C42.1 27.23,7.72 R32.1 R31.2 28.62,5.62 v28.5,5.5
SW_R  (via drill 0.35, 0.35 pad 0.6)
  Top 0.203: v37.5,6.38 37.38,6.25 20,6.25 v19.75,6.5
  Bottom 0.203: 37.6,6.48 v37.5,6.38 | SJ2.1 37.6,2.64 37.6,6.48 | C41.1 21.4,7.6 R33.2 19.88,7.88 19.75,8 | IC15.15 37.6,6.48 | v19.75,6.5 19.75,8 | 19.75,8 R30.2
USB5V
  Bottom 0.254: C40.1 22.15,34.34 22,34.19
  Bottom 0.305: 14.21,30.94 C37.1 | 20.78,30.95 IC17.20 | IC17.4 22,34.19 21.14,34.19 20.8,33.85 20.8,30.96 20.78,30.95 | 20.78,30.95 21.3,30.95 21.68,30.56 21.68,19.16 C38.+
  Bottom 0.406: IC17.20 14.21,30.94 | C38.+ 20.69,21.45 L1.1
USBDM
  Bottom 0.203: IC16.P$6 15.21,23.19 14.9,23.5 14.9,26.6 | 16.27,28.28 15.38,28.28 14.9,27.8 14.9,26.6 | C36.1 14.9,26.6
  Bottom 0.305: 16.27,28.28 IC17.16
USBDP
  Bottom 0.203: IC16.P$4 19.22,25.09 19.78,25.65 19.78,25.68 | 19.78,25.68 19.78,26.8 18.9,27.69 IC17.15 | C35.1 19.79,25.66 19.78,25.68
VCCINT  (via drill 0.35 pad 0.6)
  Top 0.305: v21.15,87.6 17.62,87.6 17.32,87.3 17.32,87.17 v17.35,87.15
  Bottom 0.254: R14.1 16.62,54.62 16.75,54.75
  Bottom 0.305: C16.1 17.27,61.05 IC7.5 | C15.1 17.3,69.05 IC6.5 | C14.1 17.3,78.8 IC5.5 | IC11.5 17.3,65.05 C20.1 | IC12.5 17.3,57.05 C21.1 | IC4.5 17.32,83.3 C13.1 v17.35,87.15 | v21.15,87.6 21.5,87.95 JP1.3 | IC10.5 17.3,74.8
  Bottom 0.406: C16.1 17.27,61.2 17.27,64.92 C20.1 17.27,65.08 17.27,68.92 C15.1 17.27,69.08 17.27,74.78 17.3,74.8 | 17.27,61.05 17.27,57.08 C21.1 16.75,56.4 16.75,54.75 16.75,50.75 16.27,50.27 15.5,50.27 C25.1 15.28,50.3 IC13.5 | C13.1 17.27,83.25 17.27,78.83 C14.1 17.27,78.67 17.27,74.83 17.3,74.8 | 17.3,74.8 C19.1
VCCIO  (via drill 0.35, 0.35 pad 0.6, 0.5 pad 0.65)
  Top 0.305: v8.53,9.47 9.03,9.97 v21.12,9.97 v27.62,9.97 27.65,10 v30.42,10 v30.43,10.01
  Top 0.406: v36,16.07 30.73,16.07 | 30.73,16.07 30.42,16.37 30.42,15.76 30.73,16.07
  Top 0.61: 30.42,16.37 v30.42,21.5 | 30.42,15.76 30.42,12 30.42,11.75 v30.42,10.01 v30.43,10.01
  Bottom 0.203: IC15.39 | R21.2 R20.2 | R19.2 R20.2 | v21.12,9.97 R33.1 | R32.2 27.25,9.6 v27.62,9.97 27.62,10.88 R20.2
  Bottom 0.254: J3.2 29.71,31.5 28.27,31.5
  Bottom 0.305: IC15.39 36,23.77 C31.1 | J2.1 7.53,7.71 7.53,8.47 v8.53,9.47
  Bottom 0.356: SJ4.2 30.25,38.14 30,37.89
  Bottom 0.406: IC15.9 C27.1 C30.1 | IC15.9 | C28.1 34.4,8.95 IC15.19 34.4,12.12 36.06,13.78 36.06,15.91 35.91,16.07 | C29.1 IC15.31 33.1,18.42 35.45,16.07 35.91,16.07 | 35.91,16.07 36,16.01 | 36,16.01 v36,16.07 IC15.39 | IC15.9 39.56,13.63 37.18,16.01 36,16.01 | Y1.P$4 32.02,25.59 C22.1 30.04,25.1 30.42,24.71 | v30.43,10.01 30.95,9.48 C32.1
  Bottom 0.508: v30.42,21.5 28.5,21.5 28.27,21.73 28.27,31.5 28.27,37.87 C26.1
  Bottom 0.61: v30.42,21.5 30.42,24.71 | C26.1 30,37.89 31.49,37.89 IC14.5
VCP
  Bottom 0.305: IC2..6 38.4,81.5 C5.2
VDD_M  (via drill 0.35 pad 0.6)
  Top 0.203: v36.38,75 v32.25,75 v30,75
  Bottom 0.203: R22.2 v36.38,75 | v32.25,75 R4.2
  Bottom 0.305: IC2..15 31.8,81 31.5,80.7 31.5,80 C10.2
  Bottom 0.356: SJ3.2 31.75,61.17 32,61.42
  Bottom 0.406: C12.1 32.98,61.42 32,61.42 IC3.5 31.8,61.42 32,61.62 32,66.38 30,68.38 v30,75 30,80
  Bottom 0.61: R5.2 30,80 31.5,80

## Text on the board
tPlace: DO0 | 1B | 1A | 2A | 2B | DO1 | GND | DI0 | harp pump v1.1 | STEP | DIR | GND | Licensed under the TAPR Open Hardware / License (www.tapr.org/OHL) | MS1 | MS2 | MS3 | !EN | GND | Hardware Platform / www.cf-hw.org
bPlace: 3V - 5V | 12V / Only! | Hardware Platform / www.cf-hw.org | CLKIN | SW_R | GND | SW_F